# EAGLE board Logger_2019 (EAGLE 7.3.0)
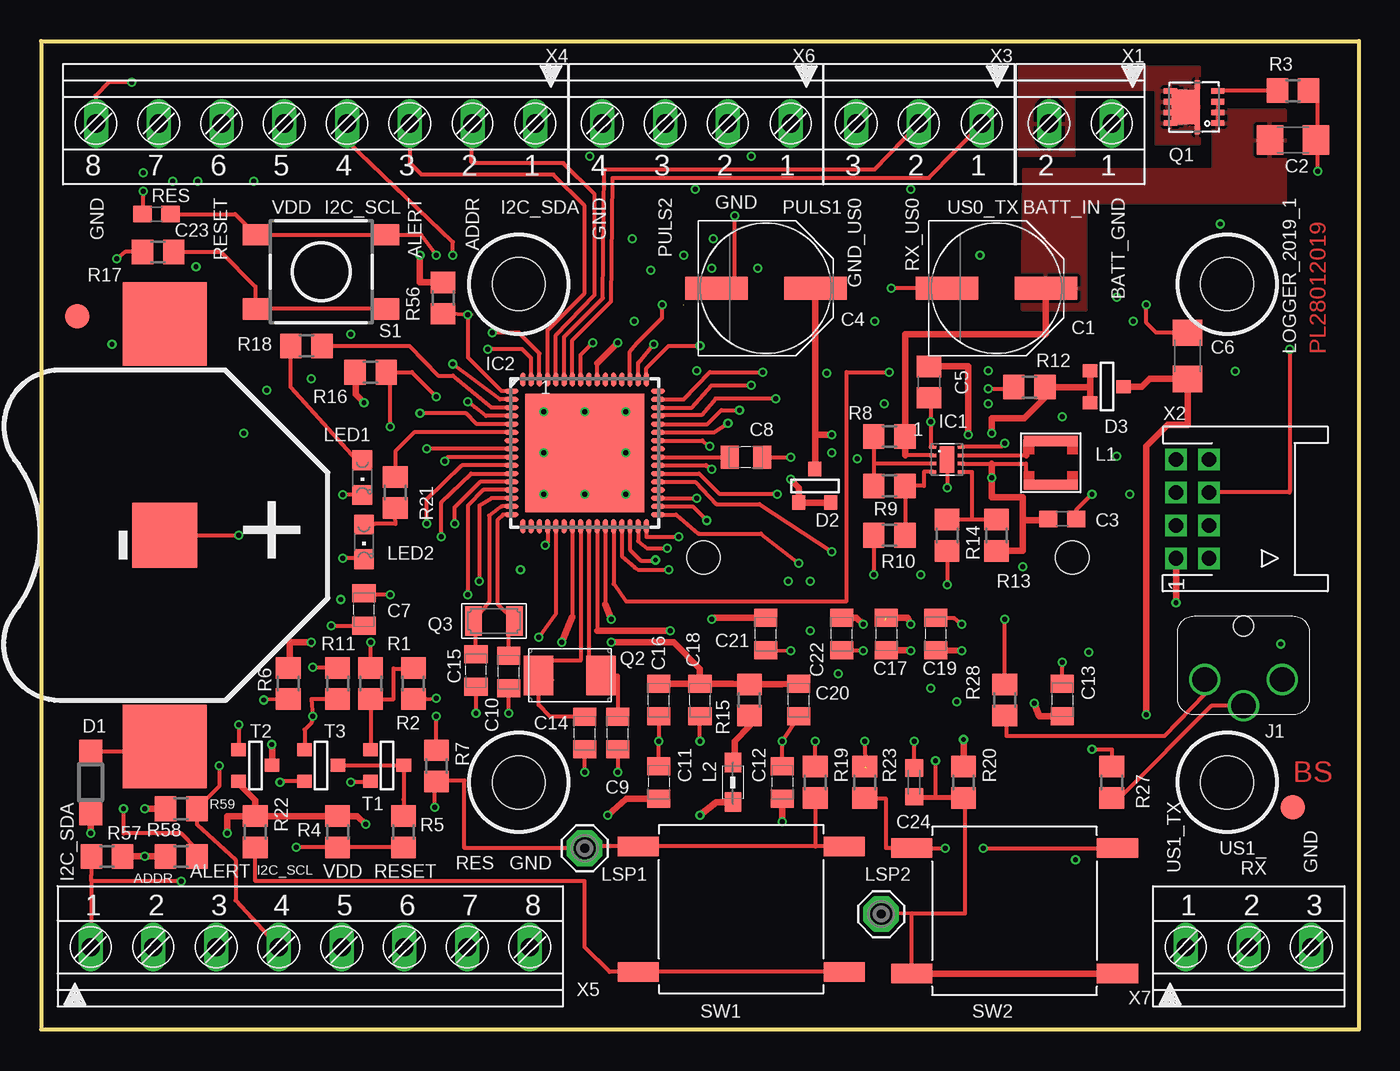
[diagram p0: board, top side]
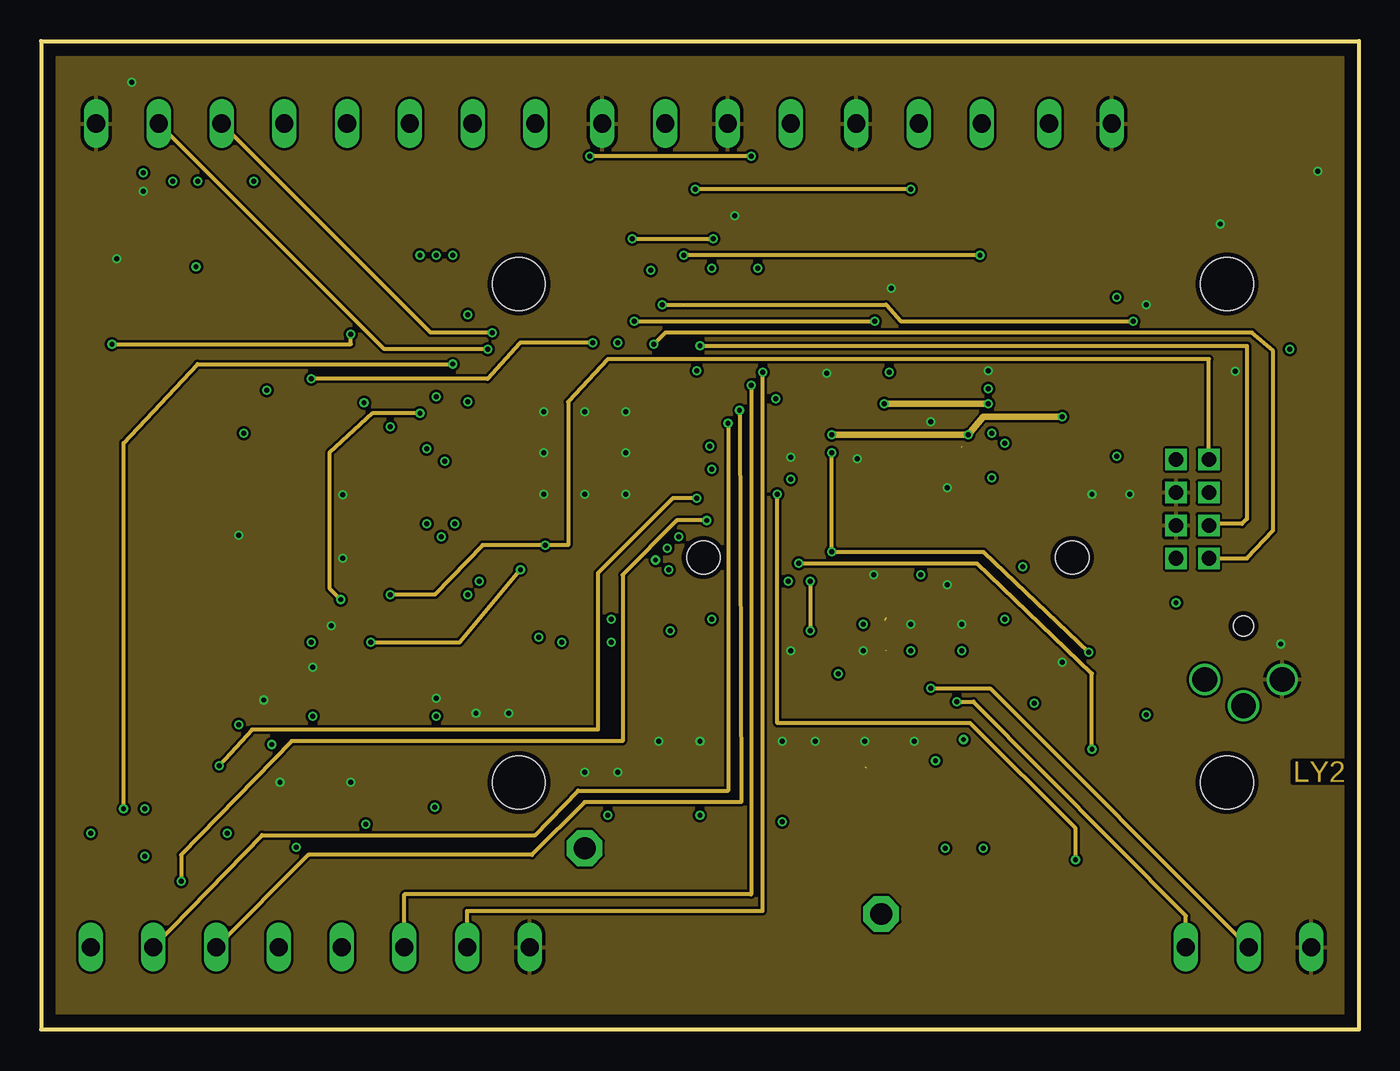
[diagram p1: board, inner layer Route2]
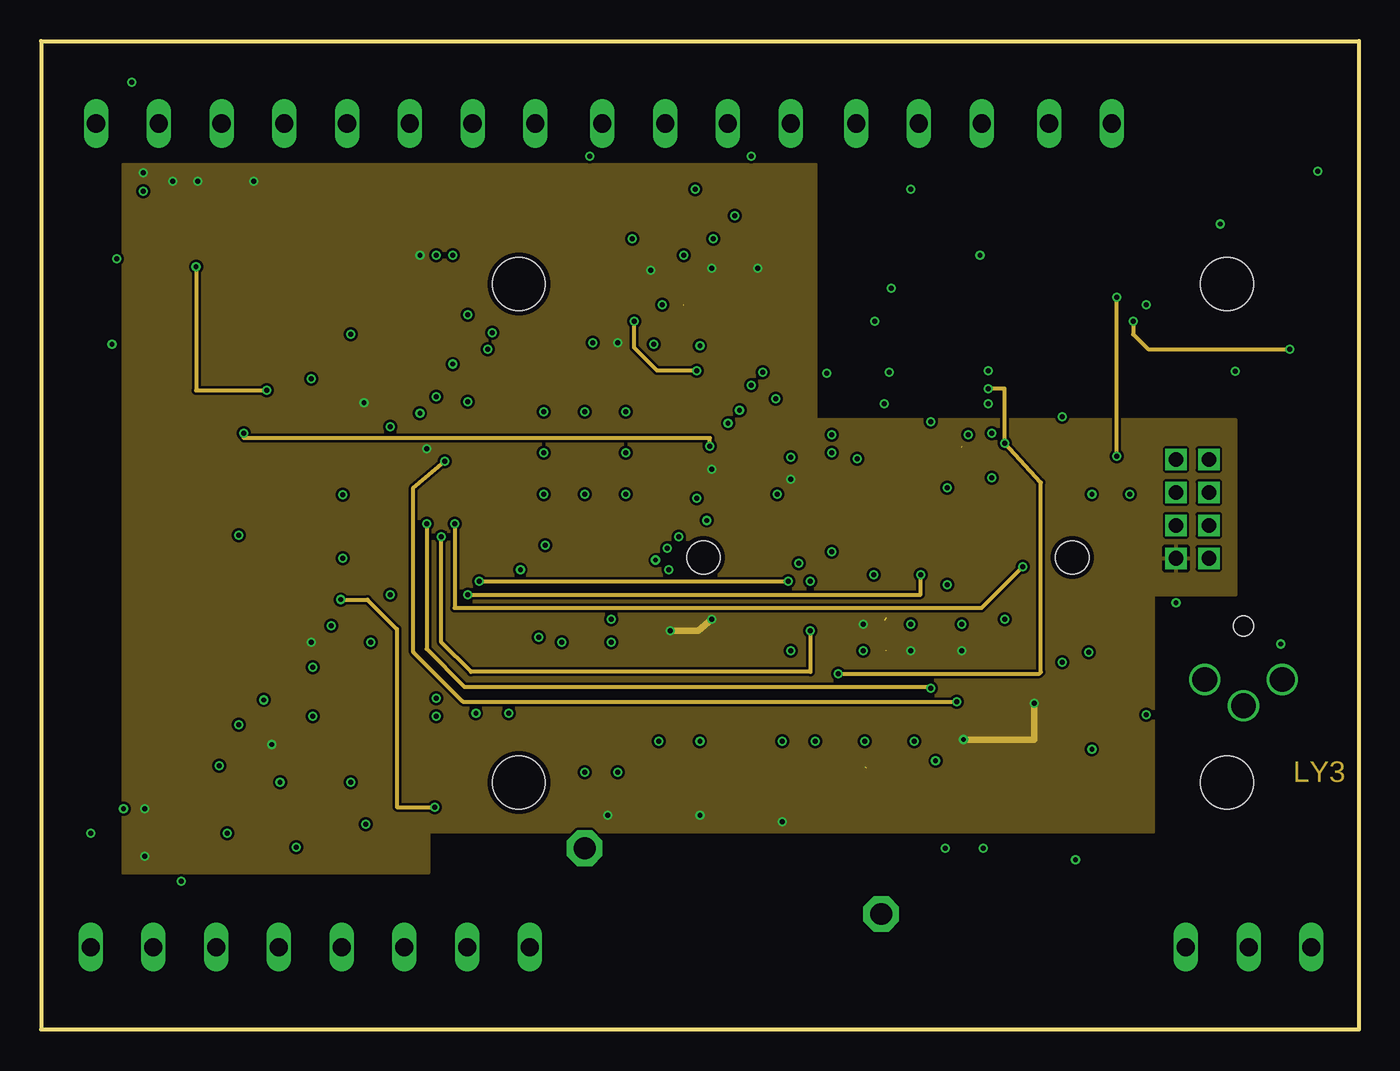
[diagram p2: board, inner layer Route3]
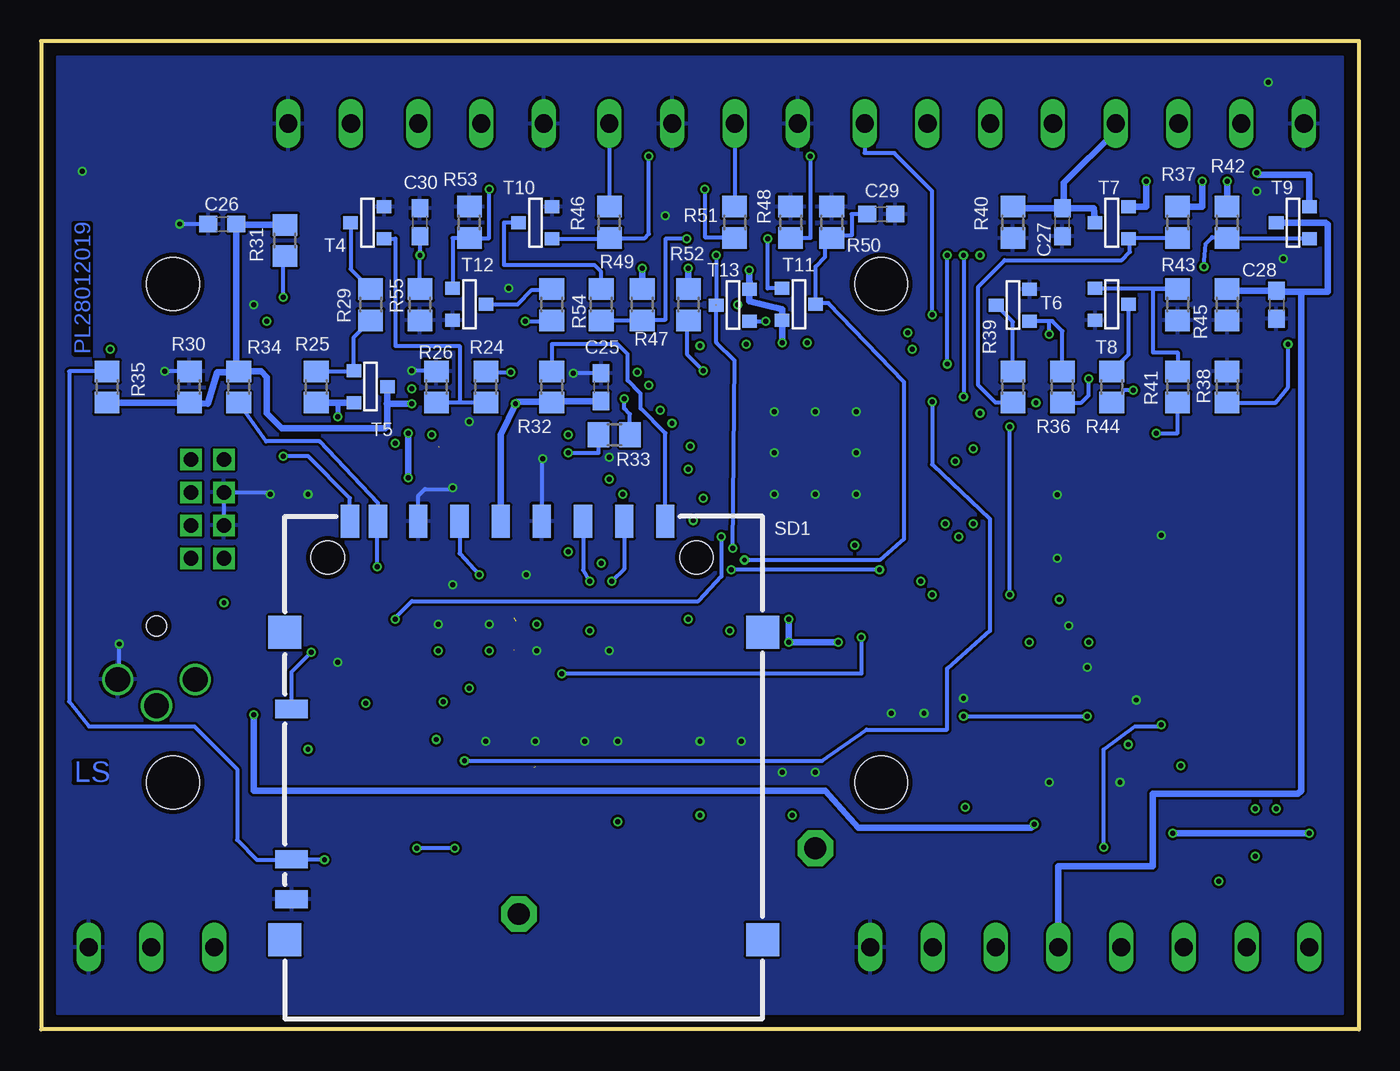
[diagram p3: board, bottom side, seen from below]

Size 80 x 60 mm. Coordinates in mm from the lower left corner, seen from the top.
Outline: 0,0 80,0 80,60 0,60 0,0
Copper layers (1+2*3+16): Top 0.035mm / dielectric 0.2mm / Route2 0.035mm / dielectric 1mm / Route3 0.035mm / dielectric 0.2mm / Bottom 0.035mm
Design rules "PCB-POOL HighSpec *": minimum track width 0.125mm, minimum drill 0.2mm, track to track 0.15mm, track to pad 0.15mm, pad to pad 0.15mm, via to via 0.15mm, smd to smd 0mil, copper to edge 0.3mm, drill to drill 0.2mm, minimum pad ring 0.2mm, minimum via ring 0.125mm, stop-mask expansion 0.075mm, vias tented up to drill 0mil, thermal gap 0.2mm
Net classes: 1 GND: width 0.2 mm; 2 VCC: width 0.25 mm
Holes 3.2 mm at 29,15 72,15 72,45.25 29,45.25

## Footprints (pad centres in the part's own frame; a part is rotated, then mirrored left to right if it is on the bottom)
3082 = smd 5.08 x 5.08: + -12.827,0; +1 12.827,0 | smd 3.962 x 3.962: - 0,0
PANASONIC_E = smd 3.8 x 1.4: + 3,0; - -3,0
C1206 = smd 1.6 x 1.8: 1 -1.4,0; 2 1.4,0
C0603 = smd 1.1 x 1: 1 -0.85,0; 2 0.85,0
C0805 = smd 1.3 x 1.5: 1 -0.95,0; 2 0.95,0
0805 = smd 1.092 x 1.397: 1 -0.991,0; 2 0.991,0
C0603K = smd 1.05 x 1.08: 1 -0.875,0; 2 0.875,0
SOD123 = smd 1.4 x 1.4: A 1.9,0; C -1.9,0
SOT-23$1 = smd 0.787 x 0.889: 1 0.025,-1.016; 2 -0.94,1.016; 3 0.991,1.016
DSG_PWSO-N8_EXP = smd 0.2 x 0.4: 1 -0.75,-0.85; 2 -0.25,-0.85; 3 0.25,-0.85; 4 0.75,-0.85; 5 0.75,0.85; 6 0.25,0.85; 7 -0.25,0.85; 8 -0.75,0.85 | smd 1.6 x 0.9: EXP 0,0
QFN64 = smd 0.85 x 0.3: 1 -4.45,3.75; 2 -4.45,3.25; 3 -4.45,2.75; 4 -4.45,2.25; 5 -4.45,1.75; 6 -4.45,1.25; 7 -4.45,0.75; 8 -4.45,0.25; 9 -4.45,-0.25; 10 -4.45,-0.75; 11 -4.45,-1.25; 12 -4.45,-1.75; 13 -4.45,-2.25; 14 -4.45,-2.75; 15 -4.45,-3.25; 16 -4.45,-3.75; 33 4.45,-3.75; 34 4.45,-3.25; 35 4.45,-2.75; 36 4.45,-2.25; 37 4.45,-1.75; 38 4.45,-1.25; 39 4.45,-0.75; 40 4.45,-0.25; 41 4.45,0.25; 42 4.45,0.75; 43 4.45,1.25; 44 4.45,1.75; 45 4.45,2.25; 46 4.45,2.75; 47 4.45,3.25; 48 4.45,3.75 | smd 0.3 x 0.85: 17 -3.75,-4.45; 18 -3.25,-4.45; 19 -2.75,-4.45; 20 -2.25,-4.45; 21 -1.75,-4.45; 22 -1.25,-4.45; 23 -0.75,-4.45; 24 -0.25,-4.45; 25 0.25,-4.45; 26 0.75,-4.45; 27 1.25,-4.45; 28 1.75,-4.45; 29 2.25,-4.45; 30 2.75,-4.45; 31 3.25,-4.45; 32 3.75,-4.45; 49 3.75,4.45; 50 3.25,4.45; 51 2.75,4.45; 52 2.25,4.45; 53 1.75,4.45; 54 1.25,4.45; 55 0.75,4.45; 56 0.25,4.45; 57 -0.25,4.45; 58 -0.75,4.45; 59 -1.25,4.45; 60 -1.75,4.45; 61 -2.25,4.45; 62 -2.75,4.45; 63 -3.25,4.45; 64 -3.75,4.45 | smd 7.2 x 7.2: 65 0,0
LUMBERG1502_01 = drill 1.5: P$1 -2.35,0.75; P$2 0,2.35; P$3 2.35,0.75 | hole 1.2: 0,-2.5
LPS3008 = smd 0.63 x 3.3: 1 -1.335,0; 2 1.335,0
0805' = smd 1.2 x 1: 1 -1.2,0; 2 1.2,0
CHIPLED_0805 = smd 1.2 x 1.2: A 0,-1.05; C 0,1.05
SE13 = drill 1.321 pad 2.159 octagon: MP 0,0
ROUND2_1.5MM = smd 1.5 x 1.5: FID 0,0
TRANSISTOR-FET_1212-8S = smd 0.8 x 0.34: 1 -1.435,0.97; 2 -1.435,0.325; 3 -1.435,-0.325; 4 -1.435,-0.975; 5 1.435,-0.975; 6 1.435,-0.325; 7 1.435,0.325; 8 1.435,0.975 | smd 0.3 x 0.8: 9 -0.2,-1.225; 10 -0.2,1.25 | smd 1.7 x 2.1: 11 0.5,-0.015
CRYSTAL2P5.0X3.2 = smd 1.8 x 2.4: 1 -1.9,0; 2 1.9,0
CRYSTAL2P3.2X1.5 = smd 1 x 1.8: 1 -1.25,0; 2 1.25,0
R0805 = smd 1.3 x 1.5: 1 -0.95,0; 2 0.95,0
DTSM-6 = smd 1.55 x 1.3: 1 -3.975,2.25; 2 3.975,2.25; 3 -3.975,-2.25; 4 3.975,-2.25
DM1AA-SF-PEJ = smd 1.1 x 2: 1 6.1,14.95; 2 3.6,14.95; 3 1.1,14.95; 4 -1.4,14.95; 5 -3.9,14.95; 6 -6.4,14.95; 7 -8.85,14.95; 8 -10.55,14.95; 9 8.6,14.95 | smd 2 x 1.1: CDS -14.1,3.55; COM -14.1,-8; WPS -14.1,-5.566 | smd 2 x 2: G1 -14.5,8.2; G2 -14.5,-10.45; G3 14.5,-10.45; G4 14.5,8.2 | hole 2: -11.9,12.75; 10.5,12.75
MULTIMEC_5GSH935 = smd 2.5 x 1.2: P -6.25,-3.81; P1 6.249,-3.81; S -6.25,3.81; S1 6.25,3.81
SOT-23 = smd 0.787 x 0.889: 1 0.025,-1.016; 2 -0.94,1.016; 3 0.991,1.016
ZETEX_SOT-23 = smd 0.787 x 0.889: 1 0.025,-1.016; 2 -0.94,1.016; 3 0.991,1.016
2POL381 = drill 1.1 long: 1 0,0; 2 3.81,0
DP11_8DP-2DS = drill 0.9 square: 1 3,-9.2; 2 3,-7.2; 3 1,-9.2; 4 1,-7.2; 5 -1,-9.2; 6 -1,-7.2; 7 -3,-9.2; 8 -3,-7.2
3POL381 = drill 1.1 long: 1 0,0; 2 3.81,0; 3 7.62,0
8POL381 = drill 1.1 long: 1 0,0; 2 3.81,0; 3 7.62,0; 4 11.43,0; 5 15.24,0; 6 19.05,0; 7 22.86,0; 8 26.67,0
4POL381 = drill 1.1 long: 1 0,0; 2 3.81,0; 3 7.62,0; 4 11.43,0

## Placement (x,y rotation side)
BH1  KEYSTONE_CELL_CLIP 3082  [3082]  7.5,30 90 top
C1  100µF/25V  [PANASONIC_E]  58,45 0 top
C2  10µF/25V  [C1206]  76,54 0 top
C3  22µF/10V  [C0603]  62,31 0 top
C4  100µF/25V  [PANASONIC_E]  44,45 0 top
C5  100nF/16V  [C0805]  53.9,39.3 270 top
C6  10µ/25V  [C1206]  69.6,40.9 270 top
C7  100n  [0805]  19.6,25.5 90 top
C8  1u  [0805]  42.8,34.75 180 top
C9  12p  [0805]  35,18 90 top
C10  18p  [0805]  28.4,21.7 90 top
C11  100n  [0805]  37.5,15 270 top
C12  100n  [0805]  45,15 270 top
C13  100n  [0805]  62,20 270 top
C14  12p  [0805]  33,18 90 top
C15  18p  [0805]  26.4,21.8 90 top
C16  10µ  [0805]  37.5,20 90 top
C17  100n  [0805]  51.3,24 270 top
C18  100n  [0805]  40,20 90 top
C19  100n  [0805]  54.3,24 270 top
C20  100n  [0805]  46,20 90 top
C21  100n  [0805]  44,24 90 top
C22  10µ  [0805]  48.6,24 90 top
C23  10n  [C0603]  7,49.5 0 top
C24  10n  [C0603K]  53,15 270 top
C25  100nF  [C0603]  46,39 90 bottom
C26  100nF  [C0603]  69,48.9 180 bottom
C27  100nF  [C0603]  18,49 270 bottom
C28  100nF  [C0603]  5,44 270 bottom
C29  100nF  [C0603]  29,49.5 0 bottom
C30  100nF  [C0603]  57,49 90 bottom
D1  RSX101M-30  [SOD123]  3,15 90 top
D2  BAT54C  [SOT-23$1]  47,33 180 top
D3  BAT54C  [SOT-23$1]  64.7,39 90 top
IC1  TPS62125  [DSG_PWSO-N8_EXP]  55,34.6 270 top
IC2  EFM32G230F128  [QFN64]  33,35 0 top
J1  LUMBERG1502_01  [LUMBERG1502_01]  73,22 180 top
L1  LPS3008/22µH  [LPS3008]  61.3,34.4 270 top
L2  BLM21B102S  [0805']  42,15 90 top
LED1  SML-H12U8TT86  [CHIPLED_0805]  19.5,33.5 180 top
LED2  SML-H12Y8TT86  [CHIPLED_0805]  19.6,29.6 180 top
LSP1  (n.b.)SE13  [SE13]  33,11 0 top
LSP2  (n.b.)SE13  [SE13]  51,7 0 top
PASS1  ROUND_1MM1.5  [ROUND2_1.5MM]  2.2,43.3 0 top
PASS2  ROUND_1MM1.5  [ROUND2_1.5MM]  76,13.5 0 top
Q1  SI7121DN  [TRANSISTOR-FET_1212-8S]  70,56 180 top
Q2  NX5032GA/32MHz/8pF  [CRYSTAL2P5.0X3.2]  32.1,21.5 180 top
Q3  CM7V, 32768Hz/12.5pF  [CRYSTAL2P3.2X1.5]  27.5,24.8 180 top
R1  100  [R0805]  20,21 270 top
R2  100K  [R0805]  22.6,21 90 top
R3  100k  [R0805]  76,57 180 top
R4  100K  [R0805]  18,12 90 top
R5  100  [R0805]  22,12 270 top
R6  100K  [R0805]  15,21 90 top
R7  100  [R0805]  24,16 90 top
R8  1M47  [R0805]  51.5,36 0 top
R9  200K  [R0805]  51.5,33 180 top
R10  30K9  [R0805]  51.5,30 0 top
R11  100K  [R0805]  18,21 270 top
R12  100K  [R0805]  60,39 180 top
R13  2M  [R0805]  58,30 270 top
R14  560K  [R0805]  55,30 90 top
R15  1  [R0805]  43,20 90 top
R16  100K  [R0805]  20,39.9 180 top
R17  100  [R0805]  7.1,47.2 180 top
R18  1K2  [R0805]  16.1,41.5 180 top
R19  (n.b.)100K/*10nF*/  [R0805]  47,15 270 top
R20  100K  [R0805]  56,15 90 top
R21  1K2  [R0805]  21.5,32.6 270 top
R22  100  [R0805]  13,12 90 top
R23  100  [R0805]  50,15 90 top
R24  100  [R0805]  53,39 90 bottom
R25  100K  [R0805]  63.3,39 270 bottom
R26  100K  [R0805]  56,39 270 bottom
R27  10K  [R0805]  65,15 270 top
R28  10K  [R0805]  58.5,20 270 top
R29  100  [R0805]  60,44 270 bottom
R30  100K  [R0805]  71,39 270 bottom
R31  10K  [R0805]  65.2,47.9 90 bottom
R32  10K  [R0805]  49,39 270 bottom
R33  1K  [R0805]  45.2,36.1 0 bottom
R34  1K  [R0805]  68,39 90 bottom
R35  (n.b.)10K  [R0805]  76,39 270 bottom
R36  100  [R0805]  18,39 270 bottom
R37  100K  [R0805]  11,49 90 bottom
R38  100K  [R0805]  8,39 270 bottom
R39  100  [R0805]  21,39 270 bottom
R40  100K  [R0805]  21,49 90 bottom
R41  100  [R0805]  11,39 270 bottom
R42  100K  [R0805]  8,49 90 bottom
R43  100K  [R0805]  11,44 90 bottom
R44  100  [R0805]  15,39 270 bottom
R45  100K  [R0805]  8,44 90 bottom
R46  100  [R0805]  45.5,49 90 bottom
R47  100K  [R0805]  43.5,44 90 bottom
R48  100K  [R0805]  34.5,49 270 bottom
R49  100  [R0805]  46,44 270 bottom
R50  100K  [R0805]  32,49 270 bottom
R51  100  [R0805]  37.9,49 90 bottom
R52  100K  [R0805]  40.7,44 90 bottom
R53  100K  [R0805]  54,49 270 bottom
R54  100  [R0805]  49,44 270 bottom
R55  100K  [R0805]  57,44 90 bottom
R56  1K  [R0805]  24.4,44.4 270 top
R57  1K  [R0805]  4,10.5 0 top
R58  1K  [R0805]  8.5,10.5 180 top
R59  1K  [R0805]  8.5,13.4 180 top
S1  SWPB_B3S1000  [DTSM-6]  17,46 0 top
SD1  DM1AA-SF-PEJ  [DM1AA-SF-PEJ]  50.7,15.9 0 bottom
SW1  5GSH935  [MULTIMEC_5GSH935]  42.5,7.3 180 top
SW2  5GSH935  [MULTIMEC_5GSH935]  59.1,7.2 0 top
T1  2N7002  [SOT-23]  21,16 90 top
T2  FDN358P  [ZETEX_SOT-23]  13,16 90 top
T3  2N7002  [SOT-23]  17,16 90 top
T4  2N7002  [ZETEX_SOT-23]  60.2,49 270 bottom
T5  FDN358P  [ZETEX_SOT-23]  60,39 90 bottom
T6  2N7002  [ZETEX_SOT-23]  21,44 270 bottom
T7  FDN358P  [ZETEX_SOT-23]  15,49 270 bottom
T8  2N7002  [ZETEX_SOT-23]  15,44 90 bottom
T9  FDN358P  [ZETEX_SOT-23]  4,49 270 bottom
T10  2N7002  [ZETEX_SOT-23]  50,49 270 bottom
T11  FDN358P  [ZETEX_SOT-23]  34,44 90 bottom
T12  2N7002  [ZETEX_SOT-23]  54,44 90 bottom
T13  FDN358P  [ZETEX_SOT-23]  38,44 270 bottom
X1  MKDS1/2-3,81  [2POL381]  65,55 180 top
X2  DF11_8DP_2DS  [DP11_8DP-2DS]  78.1,31.6 270 top
X3  MKDS1/3-3,81  [3POL381]  57.1,55 180 top
X4  MKDS1/8-3,81  [8POL381]  30,55 180 top
X5  MKDS1/8-3,81  [8POL381]  3,5 0 top
X6  MKDS1/4-3,81  [4POL381]  45.5,55 180 top
X7  MKDS1/3-3,81  [3POL381]  69.5,5 0 top

## Library data of the parts
BH1 = battery
C1 C4 C23 C25-C30 R3 R16-R26 R29-R59 = resistor
C2 C3 C5 C6 C24 R1 R2 R4-R15 R27 R28 = rcl
C7-C22 = IAR.RLC
D1 = diode
D2 D3 = zetex
IC1 = texas_Kiermaier
IC2 = EnergyMicro
J1 Q2 Q3 = EdM 2011
L1 = inductors
L2 = WE-CBF; MPN: 7427920; OC_FARNELL: 1635707; OC_NEWARK: 08P2358; PACKAGE: IND-0805; SUPPLIER: Wuerth Elektronik
LED1 LED2 = led
LSP1 LSP2 = solpad
PASS1 PASS2 = Passermarks
Q1 = dcdc_BB3_V0
S1 = switch-tact
SD1 = con-hirose
SW1 SW2 = switch-omron_1
T1 T3 = zetex; OC_FARNELL: unknown; OC_NEWARK: unknown
T2 T4-T13 = SESA
X1 X3-X7 = con-phoenix-381
X2 = con-hirose_1

## Nets
1: C3.1 D3.2 D3.3 IC1.6 L1.2 R12.1 R13.2
_: Q1.5 Q1.6 Q1.7 Q1.8 Q1.9 Q1.10 Q1.11 X1.2
AVDD [VCC]: C16.2 C18.2 C20.2 IC2.23 IC2.27 R15.2
BATT_INPUT: C1.+ C2.1 IC1.2 Q1.1 Q1.2 Q1.3 R8.2
GND: BH1.- C1.- C2.2 C3.2 C4.- C5.2 C6.1 C7.1 C8.1 C9.1 C10.1 C11.1 C12.1 C13.1 C14.1 C15.1 C16.1 C17.1 C18.1 C19.1 C20.1 C21.1 C22.1 C23.1 C24.1 C25.2 C26.2 C27.2 C28.2 C29.2 C30.2 IC1.1 IC1.EXP IC2.65 J1.P$1 LED1.C LED2.C R2.1 R3.1 R6.1 R10.1 R11.1 R14.1 R17.2 R19.1 R23.2 R26.1 R30.1 R38.1 R40.1 R43.1 R45.1 R48.1 R50.1 R53.1 R55.1 SD1.3 SD1.6 SD1.COM T1.2 T3.2 T4.2 T6.2 T8.2 T10.2 T12.2 X1.1 X2.3 X2.5 X3.3 X4.8 X5.8 X6.2 X6.4 X7.3
MCU_RESET: C7.2 C23.2 IC2.20 R16.1 S1.1 S1.2 X2.8
N$2: R1.2 R2.2 T1.3
N$3: R37.1 R39.2 T7.3
N$4: R25.1 R29.2 T5.3
N$5: IC1.3 R8.1 R9.2
N$6: R29.1 T4.1
N$7: R24.1 R26.2 T4.3
N$8: IC1.4 R9.1 R10.2
N$9: IC1.7 L1.1
N$10: R39.1 T6.1
N$11: R36.1 R38.2 T6.3
N$12: R42.1 R44.2 T9.3
N$13: R44.1 T8.1
N$14: L2.2 R15.1
N$15: LED1.A R18.2
N$16: LED2.A R21.2
N$17: BH1.+ D1.A
N$18: R41.1 R43.2 T8.3
N$19: R32.1 SD1.9
N$20: Q1.4 R3.2
N$21: R4.1 R5.2 T2.3
N$22: R7.2 R11.2 T3.3
N$23: R31.1 SD1.8
N$24: R47.1 R49.2 T11.3
N$25: R5.1 T1.1 T3.1
N$26: R17.1 S1.3 S1.4
N$27: R23.1 SW2.S SW2.S1
N$28: R49.1 T10.1
N$29: R22.1 SW1.S SW1.S1
N$30: C8.2 IC2.40
N$31: R46.1 R48.2 T10.3
N$32: R52.1 R54.2 T13.3
N$33: R54.1 T12.1
N$34: R51.1 R53.2 T12.3
N$46: IC1.5 R13.1 R14.2
PA0_SENSOR_I2C_SDA: IC2.1 R56.2 X4.1
PA1_SENSOR_I2C_SCL: IC2.2 R58.1 X4.4
PA2_POWER_LED: IC2.3 R18.1
PA3_KEY_START_STOP: C24.2 IC2.4 LSP2.MP R20.1 SW2.P SW2.P1
PA4_SIGNAL_POWER: IC2.5 LSP1.MP R7.1 R19.2 SW1.P SW1.P1
PA5_LOG_FLUSH_LED: IC2.6 R21.1
PB7_LFXTAL_P: C15.2 IC2.15 Q3.2
PB8_LFXTAL_N: C10.2 IC2.16 Q3.1
PB11_POWER_GOOD: IC1.8 IC2.21 R12.2
PB13_HFXTAL_P: C14.2 IC2.24 Q2.2
PB14_HFXTAL_N: C9.2 IC2.25 Q2.1
PC0_US1_TX: IC2.9 X7.1
PC1_US1_RX: IC2.10 X7.2
PC2_SD_SDO: IC2.11 SD1.2
PC3_SD_SDI: IC2.12 R34.1 SD1.7
PC4_SD_CLK: IC2.13 SD1.5
PC5_SD_CS: IC2.14 SD1.1
PC6_SD_CD: IC2.37 R33.1 SD1.CDS
PC7_SD_WP: IC2.38 R35.1 SD1.WPS
PC9_SENSOR2_MOSFET: IC2.42 R41.2
PC10_SENSOR2_ADDR: IC2.43 X5.2
PC11_SENSOR2_ALERT: IC2.44 X5.3
PC12_SD_PULLUP: IC2.45 R33.2
PC13_SENSOR2_RESET: IC2.46 X5.6
PC14_SENSOR2_RESERVE: IC2.47 X5.7
PD0_SD_POWER: IC2.28 R24.2
PD1_HOLD_POWER: IC2.29 R1.1
PD2_PULS1_COUNTER: C29.1 IC2.30 R50.2 T11.1
PD3_PULS2_COUNTER: C30.1 IC2.31 R55.2 T13.1
PD4_LEUART_TX: IC2.32 R28.1
PD5_LEUART_RX: IC2.33 R27.1
PD6_SENSOR_I2C_SDA: IC2.34 R57.1 X5.1
PD7_SENSOR_I2C_SCL: IC2.35 R59.1 X5.4
PE9_SENSOR1_MOSFET: IC2.57 R36.2
PE10_US0_TX: IC2.58 X3.1
PE11_US0_RX: IC2.59 X3.2
PE12_SENSOR1_ADDR: IC2.60 X4.2
PE13_SENSOR1_ALERT: IC2.61 X4.3
PE14_SENSOR1_RESET: IC2.62 X4.6
PE15_SENSOR1_RESERVE: IC2.63 X4.7
PF0_DBG_SWCLK: IC2.49 X2.4
PF1_DBG_SWDIO: IC2.50 X2.2
PF2_DBG_SWO: IC2.51 X2.6
PULS1_COUNTER: R46.2 X6.1
PULS2_COUNTER: R51.2 X6.3
RXD_HOST: J1.P$3 R28.2
SD_3V: C25.1 C26.1 R30.2 R31.2 R32.2 R34.2 R35.2 SD1.4 T5.1
TXD_HOST: J1.P$2 R27.2
VBATT: C6.2 D1.C D3.1 R4.2 R22.2 T2.2
VDD_SENSOR1: C27.1 R40.2 T7.1 X4.5
VDD_SENSOR2: C28.1 R45.2 T9.1 X5.5
VMCU: C11.2 C12.2 C13.2 C17.2 C19.2 C21.2 C22.2 D2.2 D2.3 IC2.8 IC2.26 IC2.39 IC2.55 L2.1 R6.2 R16.2 R20.2 R37.2 R42.2 R47.2 R52.2 R56.1 R57.2 R58.2 R59.2 T2.1 T7.2 T9.2 T11.2 T13.2 X2.1
VSD_CARD: C4.+ C5.1 D2.1 R25.2 T5.2

## Tracks (layer width: path | path; a pad name or v marks a point on that pad's centre or on a via)
1  (via drill 0.3)
  Top 0.254: IC1.6 57.7,34.35 59.8,34.35 59.8,33.06 L1.2 | 61.15,30.9 C3.1 | R12.1 61,39 61,38.9 | 61,38.4 61,38.9 | 61,38.9 61.1,39 | 63.58,39 63.68,39.1
  Top 0.406: 57.7,34.35 v57.7,33.5 57.7,32.3 59.6,32.3 59.6,30.9 | 59.6,30.9 61.15,30.9 | R13.2 59.6,29.05 59.6,30.9 | 61,38.4 59.7,37.1 57.7,37.1 v57.7,36.2 | D3.2 63.68,39.1 D3.3 | 61.1,39 63.58,39
  Bottom 0.406: v57.7,33.5 v57.7,36.2
_
  pour Top: 70.3,53.8 70.3,58.4 59.4,58.4 59.4,53.1 62.7,53.1 62.7,57.1 67.7,57.1 67.7,53.8
AVDD  (via drill 0.3)
  Top 0.254: IC2.23 32.25,25.05 | IC2.27 34.25,25.8
  Top 0.406: C16.2 C18.2 | C18.2 41.96,20.99 R15.2 44.96,20.95 C20.2 | 32.25,25.05 v31.6,23.5 | v34.6,23.5 38.4,23.5 40,21.9 C18.2 | 34.25,25.8 v34.6,24.9
  Bottom 0.406: v34.6,24.9 v34.6,23.5 v31.6,23.5
BATT_INPUT
  Top 0.254: Q1.3 Q1.1 | IC1.2 52.45,34.85
  Top 0.406: 52.45,34.85 R8.2 52.45,42.2 61,42.2 C1.+
  pour Top: 59.6,43.7 59.7,52.2 71.2,52.2 71.2,55.8 75.5,55.8 75.5,50.2 63.4,50.2 63.4,43.7
GND  (via drill 0.3)  (2 unrouted)
  Top 0.254: 77.5,56.75 R3.1 77.5,56.45 77.5,54.2 | IC1.1 54,35.35 v54,36.9 54,38 54.1,38.15 C5.2 | C1.- v51.6,45 | R10.1 v50.55,27.6 | R14.1 v55,27 | C13.1 62.2,20.89 62,20.9 v62,22.3 | 77.5,54.2 77.5,53.9 | 77.5,53.9 77.4,53.8 | v77.5,52.1 77.5,53.9 | 77.5,54.2 C2.2 | C15.1 v26.4,19.2 | C16.1 37.49,18.6 v37.49,17.51 v37.5,17.5 C11.1 | v40,17.5 C18.1 | C20.1 v45,17.5 C12.1 | C21.1 v45.5,23 | BH1.- v12,30 | LED2.C 19.6,28.6 v18.3,28.6 | LED1.C v18.3,32.45 | R6.1 v13.5,20 | 17.95,21.9 R11.1 17.95,22 v16.5,22 | T1.2 20,15 v18.8,15 18.7,15 | T3.2 14.5,15.06 v14.5,15 | 22.2,20.05 R2.1 23.35,20.05 v24,20.1 | v28.4,19.2 C10.1 | C24.1 v53,17.5 | 50.1,15.88 v50,17.5 | R19.1 v47,17.5 | C8.1 v45.5,34.75 | C23.1 6.2,49.5 v6.2,50.9 | R17.2 5.1,47.2 v4.6,46.8 | 19.01,24.51 C7.1 v17.6,24.5 | IC1.EXP v55,32.9 | C4.- 42.1,45 v42.1,49.4 | IC2.65 v33,32.5 | C22.1 49.69,23.01 v49.9,23 | 51,25 51.2,24.8 | C19.1 55.41,24.99 v55.9,24.6 | C3.2 62.85,31.55 v63.8,32.5 | C9.1 v35,15.6 | 3.33,55.23 X4.8 3.3,55.03 3.3,56.7 4.1,57.5 v5.5,57.5 | 68.8,42.3 67.7,42.3 67.1,42.9 v67.1,44 | v33,15.6 C14.1
  Top 0.406: C17.1 52.61,24.99 v52.8,24.6 | C6.1 68.8,42.3
  Bottom 0.254: 55.02,43.1 T12.2 | C26.2 v71.6,48.9 | J1.P$1 75.25,21.45 v75.25,23.4 | R26.1 56,40.3 56.1,40 v57.5,40 | C25.2 v47.7,39.85 | v66.1,32.5 66.2,32.6 X2.5 X2.3 | R30.1 v72.5,39.95 | SD1.6 57.1,32.4 56.7,32.8 55.1,32.8 v55,32.9 | 49.6,34.7 SD1.3
  other vias: 30.5,37.5 33,37.5 35.5,37.5 35.5,35 30.5,35 30.5,32.5 35.5,32.5 49.55,34.65
  pour Route2: 1,59 79,59 79,1 1,1
  pour Bottom: 1,59 79,59 79,1 1,1
MCU_RESET  (via drill 0.3)
  Top 0.254: IC2.20 30.75,29.55 v30.6,29.4 | C23.2 11.78,49.5 S1.1 S1.2 23.05,48.25 v24,47 | v21.2,36.6 21.2,39.95 R16.1 22.5,39.9 v24,38.4 | v21.2,26.4 19.79,26.4 C7.2
  Route2 0.254: X2.8 70.9,40.7 34.4,40.7 32,38.1 32,29.4 v30.6,29.4 26.8,29.4 23.9,26.4 v21.2,26.4
  Bottom 0.254: v24,47 v24,38.4 | v21.2,26.4 v21.2,36.6
N$2
  Top 0.254: R1.2 21.4,20.05 21.4,21.9 22.7,21.9 R2.2 | R1.2 20,20.2 | R1.2 20,17.01 T1.3
N$3
  Bottom 0.254: R37.1 13.94,48.05 T7.3 13.9,47.92 13.9,47.2 14.4,46.7 21.5,46.7 23.1,45.1 23.1,39.1 22.05,38.05 R39.2
N$4
  Bottom 0.254: R25.1 61.06,39.95 T5.3 61.02,42.03 R29.2
N$5
  Top 0.254: IC1.3 50.55,34.35 | 50.55,34.35 R9.2 | R8.1 50.55,34.35
N$6
  Bottom 0.254: T4.1 61.22,46.17 R29.1
N$7
  Bottom 0.254: R24.1 54.6,38.05 | 54.6,38.05 R26.2 | T4.3 58.5,48.01 58.5,41.5 54.6,41.5 54.6,38.05
N$8
  Top 0.254: IC1.4 53.6,33.85 53.6,33 R9.1 R10.2
N$9
  Top 0.254: IC1.7 59.8,34.85 | L1.1 59.8,35.73
  Top 0.406: 59.8,35.73 59.8,34.85
N$10
  Bottom 0.254: R39.1 21,42.96 T6.1
N$11  (via drill 0.3)
  Route2 0.254: v4.3,41.6 18.8,41.6 v18.8,42.2
  Bottom 0.254: R36.1 18,42.4 18.6,43 18.8,43 | 18.8,43 T6.3 | R38.2 5.05,38.05 4.3,39 v4.3,41.6 | v18.8,42.2 18.8,43
N$12  (via drill 0.3)
  Route3 0.254: v9.4,46.3 9.4,38.8 v13.7,38.8
  Bottom 0.254: T9.3 8,48.01 R42.1 | R42.1 8,48 | v13.7,38.8 14.25,38.8 R44.2 | v9.4,46.3 9.3,47.7 8.9,48.1 8.05,48.1 R42.1
N$13
  Bottom 0.254: T8.1 13.98,40.97 R44.1
N$14
  Top 0.406: R15.1 43,18.4 42.1,17.5 42.1,16.3 L2.2
N$15
  Top 0.254: LED1.A 19.15,34.55 15.15,39 R18.2
N$16
  Top 0.254: R21.2 21.45,31.45 21.5,30.7 20.25,30.7 LED2.A
N$17
  Top 0.254: 7.5,17.2 BH1.+ 7.5,16.9 D1.A
N$18
  Bottom 0.254: T8.3 11,44.99 R43.2 12.5,44.95 12.5,41.1 11,41.1 R41.1
N$19
  Bottom 0.254: SD1.9 42.1,36.2 43.6,37.7 43.6,38.6 44.4,39.4 44.4,41 45,41.6 49,41.6 R32.1
N$20
  Top 0.254: R3.2 71.46,57 Q1.4
N$21  (via drill 0.3)
  Top 0.254: R5.2 R4.1 v15.5,11.05 | v12,18.5 12,17.01 T2.3
  Bottom 0.254: v15.5,11.05 15.5,17 13.6,18.4 12.1,18.4 v12,18.5
N$22  (via drill 0.3)
  Top 0.254: R7.2 v24,19 | 15.9,16.99 T3.3 16,17.01 16,18.2 16.4,18.6 v16.5,19 16.4,20.05 R11.2
  Bottom 0.254: v24,19 v16.5,19
N$23  (via drill 0.3)
  Route3 0.254: v65.3,34.8 v65.3,44.45
  Bottom 0.254: v65.3,44.45 65.3,46.85 R31.1 | SD1.8 61.25,32.25 63.8,34.8 v65.3,34.8
N$24  (via drill 0.3)
  Route2 0.254: v35.9,48 v40.8,48
  Bottom 0.254: T11.3 35.89,44.99 v35.9,48 | v40.8,48 42.1,48 42.1,43.1 43.45,43.1 R47.1 R49.2
N$25
  Top 0.254: T3.1 T1.1 22,13.97 R5.1
N$26
  Top 0.254: 21.02,43.7 S1.4 S1.3 13,43.77 13,45.1 10.9,47.2 R17.1
N$27  (via drill 0.3)
  Top 0.254: v54.9,11 v54.89,11.01 SW2.S 51.3,11.01 51.3,14 50,14 R23.1 50,13.86 | v57.2,11 SW2.S1
  Bottom 0.254: v54.9,11 v57.2,11
N$28
  Bottom 0.254: R49.1 46,46 46.4,46.4 51.9,46.4 51.9,49 51.02,49 T10.1
N$29
  Top 0.254: SW1.S SW1.S1 34.51,3.49 33,5 33,9 13,9 R22.1
N$30
  Top 0.254: IC2.40 C8.2
N$31  (via drill 0.3)
  Route2 0.254: v43.1,53 v33.3,53
  Bottom 0.254: T10.3 45.54,48.01 R46.1 43.35,48.05 43.1,48.3 v43.1,53 | v33.3,53 33.3,48.05 R48.2
N$32  (via drill 0.3)
  Route2 0.254: v36,43 v50.6,43
  Route3 0.254: v39.8,40 37.4,40 36,41.4 v36,43
  Bottom 0.254: T13.3 v36,43.01 v36,43 | v50.6,43 49,43 R54.2 | R52.1 40.5,43.05 40.5,43 40.8,43 40.8,41 v39.8,40
N$33
  Bottom 0.254: T12.1 51.08,44.02 50.2,44.9 49.05,44.9 R54.1
N$34  (via drill 0.3)
  Route2 0.254: v52.8,51 v39.7,51
  Bottom 0.254: T12.3 55.02,48.05 R53.2 52.8,48.05 v52.8,51 | 38.05,48.1 R51.1 37.9,48.1 39.7,48.1 v39.7,51
N$46
  Top 0.254: IC1.5 56.5,33.85 56.5,30.95 | R13.1 56.5,30.95 | 56.5,30.95 R14.2
PA0_SENSOR_I2C_SDA  (via drill 0.3)
  Top 0.254: R56.2 26.1,43.4 v25.9,43.4 25.9,40.8 27.95,38.75 IC2.1
  Bottom 0.254: X4.1 30,53.2 28.2,53.2 25.9,50.9 v25.9,43.4
PA1_SENSOR_I2C_SCL  (via drill 0.3)
  Top 0.254: IC2.2 27.85,38.25 v25,40.4 | v25,47 25,47.8 18.6,53.9 18.6,54.97 X4.4 | R58.1 9.45,10.95 8.5,11.9 5,11.9 v5,13.4
  Route2 0.254: v5,13.4 5,35.6 9.5,40.4 v25,40.4
  Bottom 0.254: v25,40.4 v25,47
PA2_POWER_LED
  Top 0.254: IC2.3 27.35,37.75 25,39.7 24.1,39.7 22.35,41.5 R18.1
PA3_KEY_START_STOP  (via drill 0.3)
  Top 0.254: SW2.P 52.85,7.05 | 52.85,7.05 LSP2.MP | R20.1 53.08,14.05 C24.2 54.3,14.12 | 54.3,14.12 55.88,14.12 56.1,13.9 56.1,7.05 52.85,7.05 | 54.3,14.12 v54.3,16.3 | IC2.4 27,37.25 26.3,37.8 v25.9,38.1
  Top 0.406: SW2.P1 SW2.P
  Bottom 0.254: v54.3,16.3 32.6,16.3 29.9,18.2 25,18.2 25,21.9 22.4,24.2 22.4,31 25.9,34.3 v25.9,38.1
PA4_SIGNAL_POWER  (via drill 0.3)
  Top 0.254: SW1.P 47,11.11 | 47,11.11 SW1.P1 32.8,11.11 LSP1.MP 25.7,11 25.7,15.1 24.05,15.1 R7.1 23.9,14.95 v23.9,13.5 | IC2.5 26.45,36.75 25.8,37.4 v23,37.4 | R19.2 47,11.11
  Route2 0.254: v23,37.4 20.1,37.4 17.5,35 17.5,26.8 v18.2,26.1
  Route3 0.254: v18.2,26.1 19.8,26.1 21.6,24.3 21.6,13.5 v23.9,13.5
PA5_LOG_FLUSH_LED
  Top 0.254: IC2.6 22.65,36.25 21.5,35.1 R21.1
PB7_LFXTAL_P
  Top 0.254: IC2.15 27.95,31.75 27.2,31.2 27.2,25.95 Q3.2 26.4,24.65 C15.2
PB8_LFXTAL_N
  Top 0.254: IC2.16 28.05,31.25 27.7,30.9 27.7,25.85 Q3.1 28.4,24.45 C10.2
PB11_POWER_GOOD  (via drill 0.3)  (1 unrouted)
  Top 0.254: 31.25,30.7 IC2.21 31.25,25.25 v30.2,23.8 | 59.05,38.9 R12.2 58.95,38.9 v57.5,38.9 | 55.9,35.4 58.3,35.4 v58.5,35.6
  Route3 0.254: v48.4,21.6 60.6,21.6 60.7,21.7 60.7,33.2 v58.5,35.6 58.5,38.9 v57.5,38.9
  Bottom 0.254: v30.2,23.8 30.2,21.6 v48.4,21.6
PB13_HFXTAL_P
  Top 0.254: IC2.24 32.75,22.4 30.7,22.4 30.3,22.2 Q2.2 | 31,21.2 Q2.2 | C14.2 30.91,18.99 30.2,19.7 Q2.2
PB14_HFXTAL_N
  Top 0.254: IC2.25 33.25,21.55 Q2.1 34.3,21.49 35,21.49 C9.2
PC0_US1_TX  (via drill 0.3)
  Top 0.254: IC2.9 24.7,34.75 v24.5,34.5
  Route2 0.254: X7.1 69.5,6.9 56.6,19.9 v55.6,19.9
  Route3 0.254: v24.5,34.5 22.6,32.9 22.6,22.9 25.6,19.9 v55.6,19.9
PC1_US1_RX  (via drill 0.3)
  Top 0.254: IC2.10 25.55,34.25 23.4,32.2 v23.4,30.7
  Route2 0.254: v54,20.7 57.61,20.7 X7.2
  Route3 0.254: v23.4,30.7 23.4,23.1 25.7,20.8 54,20.8 v54,20.7
PC2_SD_SDO  (via drill 0.3)
  Top 0.254: IC2.11 26.1,33.75 24.3,32 v24.3,29.9
  Route2 0.254: v46.7,27.2 v46.7,24.2
  Route3 0.254: v46.7,24.2 46.7,21.7 26.1,21.7 24.3,23.5 v24.3,29.9
  Bottom 0.254: SD1.2 47.1,27.9 v46.7,27.2
PC3_SD_SDI  (via drill 0.3)
  Top 0.254: IC2.12 26.65,33.25 25.1,31.7 v25.1,30.7
  Route3 0.254: v25.1,30.7 25.1,25.6 57.1,25.6 v59.6,28.1
  Bottom 0.254: v59.6,28.1 59.6,30.8 SD1.7 59.55,31.95 63.1,35.7 66.35,35.7 R34.1
PC4_SD_CLK  (via drill 0.3)
  Top 0.254: IC2.13 26.85,32.75 25.9,31.8 v25.9,26.4
  Route3 0.254: v25.9,26.4 53.4,26.4 v53.4,27.6
  Bottom 0.254: SD1.5 54.6,28.9 v53.4,27.6
PC5_SD_CS  (via drill 0.3)
  Top 0.254: v26.6,27.2 26.6,31.8 27.35,32.25 IC2.14
  Route3 0.254: v26.6,27.2 v45.35,27.2
  Bottom 0.254: SD1.1 44.6,27.95 v45.35,27.2
PC6_SD_CD  (via drill 0.3)
  Top 0.254: IC2.37 39.7,33.25 41,31.9 43.6,31.9 v48,29
  Route2 0.254: v63.6,22.9 57.2,29 v48,29 v48,35
  Bottom 0.254: 46.2,36.05 R33.1 46.15,35 v48,35 | SD1.CDS 64.8,21.7 v63.6,22.9
PC7_SD_WP  (via drill 0.3)
  Top 0.254: IC2.38 39.95,33.75 41.2,32.5 v44.7,32.5
  Route2 0.254: v44.7,32.5 44.7,18.6 56.4,18.6 62.8,12.2 v62.8,10.3
  Bottom 0.254: v62.8,10.3 64.8,10.3 SD1.WPS 64.83,10.3 66.9,10.3 68.1,11.5 68.1,15.8 70.7,18.4 77.1,18.4 78.3,19.9 78.3,39.95 R35.1
PC9_SENSOR2_MOSFET  (via drill 0.3)
  Top 0.254: IC2.42 40.15,35.75 v40.6,35.4
  Route3 0.254: v40.6,35.4 40.6,35.9 12.3,35.9 v12.3,36.2
  Bottom 0.254: v12.3,36.2 11,36.2 R41.2
PC10_SENSOR2_ADDR  (via drill 0.3)
  Top 0.254: IC2.43 40.85,36.25 v41.7,36.8
  Route2 0.254: v41.7,36.8 41.7,14.5 32.6,14.5 30,11.8 13.41,11.8 X5.2
PC11_SENSOR2_ALERT  (via drill 0.3)
  Top 0.254: IC2.44 40.45,36.75 41.3,37.6 v42.4,37.6
  Route2 0.254: v42.4,37.6 42.5,13.8 33,13.8 29.8,10.6 16.22,10.6 X5.3
PC12_SD_PULLUP  (via drill 0.3)
  Top 0.254: v44.6,38.3 40.95,38.3 40.1,37.3 37.5,37.3 IC2.45
  Bottom 0.254: R33.2 44.25,37.35 44.6,37.7 v44.6,38.3
PC13_SENSOR2_RESET  (via drill 0.3)
  Top 0.254: IC2.46 39.5,37.75 40.7,39.1 v43.1,39.1
  Route2 0.254: v43.1,39.1 43.1,8.2 22.05,8.2 X5.6
PC14_SENSOR2_RESERVE  (via drill 0.3)
  Top 0.254: IC2.47 39,38.25 40.6,39.9 v43.8,39.9
  Route2 0.254: X5.7 25.86,7.2 43.8,7.2 v43.8,39.9
PD0_SD_POWER  (via drill 0.3)
  Top 0.254: IC2.28 34.75,27.05 35.5,26 48.9,26 48.9,39.9 v51.5,39.9
  Bottom 0.254: 52.45,39.9 v51.5,39.9
  Bottom 0.406: R24.2 52.45,39.9
PD1_HOLD_POWER  (via drill 0.3)
  Top 0.254: IC2.29 35.25,28.73 36.03,28.05 36.25,27.9 v38.1,27.9 | R1.1 v20,23.5
  Route2 0.254: v20,23.5 25.4,23.5 v29.1,27.9
  Bottom 0.254: v29.1,27.9 v38.1,27.9
PD2_PULS1_COUNTER  (via drill 0.3)
  Top 0.254: IC2.30 35.75,29.13 36.41,28.47 37.27,28.47 v37.3,28.5
  Bottom 0.254: T11.1 32.91,44.1 32.2,44.1 27.6,39.3 27.6,29.8 29.1,28.5 v37.3,28.5 | 33,44.04 T11.1 | T11.1 32.98,46.32 32.4,46.9 32.4,48.15 | C29.1 30.8,49.5 30.8,48.2 32,48.2 R50.2
  Bottom 0.406: 32.4,48.15 32,48.15 R50.2
PD3_PULS2_COUNTER  (via drill 0.3)  (1 unrouted)
  Top 0.254: IC2.31 36.25,29.65 36.8,29.2 v38,29.2
  Route2 0.254: v57,47 v39,47
  Bottom 0.254: v38,29.2 37.9,40.6 39,41.7 39,43.96 T13.1 | C30.1 v57,47 R55.2 | v39,47 39,43.99
PD4_LEUART_TX  (via drill 0.3)
  Top 0.254: IC2.32 36.75,29.9 v38.7,29.9 | R28.1 v58.5,24.9
  Bottom 0.254: v38.7,29.9 38.7,27.5 40.1,26 57.5,26 58.6,24.9 v58.5,24.9
PD5_LEUART_RX  (via drill 0.3)
  Top 0.254: IC2.33 38.55,31.25 39.9,30.1 43.7,30.1 v46,28.3 | 64.65,15.6 R27.1 65,17 v63.8,17
  Route2 0.254: v63.8,17 63.8,21.6 56.8,28.3 v46,28.3
PD6_SENSOR_I2C_SDA  (via drill 0.3)
  Top 0.254: R57.1 3.05,9.4 3.05,9 | 3.05,9 3.05,5.05 X5.1 | IC2.34 39.55,31.75 v40.4,30.9 | v8.5,9 3.05,9
  Route2 0.254: v8.5,9 8.5,10.6 15.2,17.5 35.3,17.5 35.3,27.6 38.6,30.9 v40.4,30.9
PD7_SENSOR_I2C_SCL  (via drill 0.3)
  Top 0.254: X5.4 11.8,7.83 11.8,10.3 9.45,12.45 R59.1 10.8,14.75 v10.8,16 | IC2.35 v39.8,32.25
  Route2 0.254: v10.8,16 12.8,18.2 33.8,18.2 33.8,27.7 38.35,32.25 v39.8,32.25
PE9_SENSOR1_MOSFET  (via drill 0.3)
  Top 0.254: IC2.57 32.75,40.95 v33.5,41.7
  Route2 0.254: v33.5,41.7 29.1,41.7 27.1,39.5 v16.4,39.5
  Bottom 0.254: R36.2 16.85,38.05 16.4,38.5 v16.4,39.5
PE10_US0_TX
  Top 0.254: X3.1 53.9,51.7 34.7,51.7 34.6,44.2 32.25,41.85 IC2.58
PE11_US0_RX
  Top 0.254: X3.2 50.59,52.2 34.22,52.2 34.2,52.22 34.1,44.4 31.75,42.05 IC2.59
PE12_SENSOR1_ADDR
  Top 0.254: X4.2 26.09,52.71 26.2,52.6 31.7,52.6 33.6,50.7 33.6,44.6 31.25,42.15 IC2.60
PE13_SENSOR1_ALERT
  Top 0.254: IC2.61 30.75,42.45 33,44.7 33,50 31.1,51.9 23.1,51.9 22.4,52.6 22.4,54.98 X4.3
PE14_SENSOR1_RESET  (via drill 0.3)
  Top 0.254: IC2.62 30.25,41.05 29,42.3 v27.4,42.3
  Route2 0.254: v27.4,42.3 23.65,42.3 X4.6
PE15_SENSOR1_RESERVE  (via drill 0.3)
  Top 0.254: IC2.63 29.75,40.75 29.2,41.3 v27.1,41.3
  Route2 0.254: v27.1,41.3 20.84,41.3 X4.7
PF0_DBG_SWCLK  (via drill 0.3)
  Top 0.254: IC2.49 36.75,40.15 38.1,41.5 v40,41.5
  Route2 0.254: v40,41.5 73.2,41.5 73.2,31 72.9,30.7 71,30.7 X2.4
PF1_DBG_SWDIO  (via drill 0.3)
  Top 0.254: 36.25,39.85 IC2.50 36.25,40.45 v37.2,41.6
  Route2 0.254: X2.2 73.2,28.6 74.8,30.3 74.8,41.2 73.5,42.3 37.9,42.3 v37.2,41.6
PF2_DBG_SWO  (via drill 0.3)
  Top 0.254: IC2.51 35.75,41.15 36.15,41.65 37.7,43.2 v37.7,44 | v75.8,41.3 75.8,32.6 X2.6
  Route2 0.254: v37.7,44 51.3,44 52.2,43 v66.3,43
  Route3 0.254: v66.3,43 66.3,42.2 67.2,41.3 v75.8,41.3
PULS1_COUNTER
  Bottom 0.254: 45.5,55.1 X6.1 R46.2
PULS2_COUNTER
  Bottom 0.254: X6.3 37.88,54.3 R51.2
RXD_HOST
  Top 0.254: J1.P$3 70.65,20.35 68.2,17.8 58.6,17.8 58.6,19.05 R28.2
SD_3V  (via drill 0.3)
  Route2 0.406: v57.5,38 v51.2,38
  Bottom 0.254: 68.05,39.9 R34.2 68.15,40.1 | 48.9,38.15 R32.2 49.05,38.1 | 59.1,36.5 59,36.6 | 59,39.2 59,39.01 T5.1 59.01,38 | 51.1,38.1 v51.2,38 | 68.1,48.85 C26.1
  Bottom 0.406: R35.2 R30.2 69.9,38 69.3,39.9 68.05,39.9 | C25.1 48.9,38.15 | R34.2 66.65,39.95 66.3,39.6 66.3,37.4 65.4,36.5 59.1,36.5 | 59,36.6 59,39.01 | v57.5,38 59.01,38 | 49.05,38.1 51.1,38.1 | SD1.4 52.1,36.1 v51.2,38 | R31.2 68.1,48.85 | 68.15,40.1 C26.1
TXD_HOST
  Top 0.254: J1.P$2 71.05,19.65 65.5,14.1 65.05,14.1 R27.2
VBATT  (via drill 0.3)
  Top 0.254: 12.95,12.95 R22.2 | 69.8,39.2 C6.2 | T2.2 11.98,14.92
  Top 0.406: D1.C v3,11.9 | v11.3,11.9 11.3,12.95 12.95,12.95 | v19.7,12.45 19.2,12.95 R4.2 R22.2 13,13.9 11.98,14.92 | D3.1 66.83,39.02 67.3,39.5 C6.2 69.6,36.7 68.4,36.7 67.1,35.4 v67.1,19.1
  Bottom 0.406: v3,11.9 v11.3,11.9 | v67.1,19.1 67.1,14.5 32.4,14.5 30.4,12.25 19.9,12.25 v19.7,12.45
VDD_SENSOR1
  Bottom 0.254: 17.9,49.95 C27.1 18.1,49.85
  Bottom 0.406: X4.5 14.76,54.54 17.9,51.4 17.9,49.95 | C27.1 16.09,49.85 T7.1 | 18.1,49.85 20.9,49.85 R40.2
VDD_SENSOR2
  Bottom 0.254: 2,48.98 2,48.9 1.9,48.9 | 5,44.8 C28.1 | 8,44.85 R45.2
  Bottom 0.406: X5.5 18.25,9.9 12.5,9.9 12.5,14.3 3.7,14.3 3.5,14.5 3.5,44.75 C28.1 8,44.85 | T9.1 2,48.98 | 1.9,48.9 1.9,44.8 5,44.8
VMCU  (via drill 0.3)  (1 unrouted)
  Top 0.254: C21.2 | C12.2 44.79,13.8 45.2,14 | R20.2 56,16.05 | R6.2 15.1,21.95 | v16.4,23.5 16.4,23.3 | 14.02,17.32 v14,17.3 | IC2.55 33.75,40.45 | C19.2 53.99,23.01 | R16.2 19.1,39.9 | 33.7,30.55 IC2.26 33.75,24.2 | IC2.8 v23.4,35.25 | v52.79,23.01 v52.8,23 | 40.7,25 v40.7,24.9 | IC2.39 40.35,34.25
  Top 0.305: 40.35,34.25 v40.7,34
  Top 0.406: X2.1 v68.9,25.9 | 56,16.05 v56,17.6 | L2.1 41,13.8 v40,13 | 15.1,21.95 15.1,23.5 v16.4,23.5 | T2.1 14.02,17.32 | R57.2 v6.3,10.5 R58.2 | R59.2 v6.3,13.4 | 33.75,40.45 v35,41.7 | 53.99,23.01 v55.9,23 | D2.2 D2.3 46.01,32.89 v45.5,33.4 | v23,47 23,45.35 R56.1 | v45,12.6 C12.2 | C17.2 v52.79,23.01 | 33.75,24.2 v38.2,24.2 | C21.2 40.7,25 | 19.1,39.9 19.1,38.55 v19.6,38.05 | C22.2 49.49,24.99 v49.9,24.6 | v60.3,19.8 60.6,19 61.9,19 61.9,19.01 C13.2 | C11.2 35.51,14.01 v34.4,13
  Route3 0.406: v38.2,24.2 39.9,24.2 v40.7,24.9 | v56,17.6 60.28,17.6 60.28,19.8 v60.3,19.8
  Bottom 0.254: 35,43.04 T11.2 | 37,44.9 36.94,44.9 | 36.8,45 36.94,44.9 | 36.94,44.9 T13.2 | R52.2 | 37,46.02 37,46 | R42.2 | T7.2
  Bottom 0.406: v35,41.7 35,43.04 | T11.2 35.02,43.72 37,44.2 37,44.9 | R47.2 v43.5,46.2 | R52.2 v40.7,46.2 | T13.2 37,46.02 | R42.2 v8,51.5 | R37.2 9.5,49.95 v9.5,51.5 | T7.2 12.9,49.94 v12.9,51.5 | T9.2 3,49.94 3,51.9 6.1,51.9 v6.2,52 | v37,46.1 37,46 37,45.1
  pour Route3: 5,52.5 47,52.5 47,37 72.5,37 72.5,26.4 67.5,26.4 67.5,12 23.5,12 23.5,9.5 5,9.5
VSD_CARD  (via drill 0.3)
  Top 0.254: 47,34.04 D2.1
  Top 0.406: v56.3,36.1 56.3,40.25 C5.1 | C4.+ 47,36.1 | 47,36.1 47,34.04 | v48,36.1 47,36.1
  Route2 0.406: v48,36.1 v56.3,36.1 57.2,37.2 v62,37.2
  Bottom 0.254: T5.2 60.98,38.1 62,38.1
  Bottom 0.305: 62,38.1 v62,37.2
  Bottom 0.406: R25.2 T5.2

## Text on the board
Top: PL28012019 | BS
Route2: LY2
Route3: LY3
Bottom: PL28012019 | LS
tPlace: LOGGER_2019_1
tNames: GND | RES | RESET | VDD | I2C_SCL | ALERT | ADDR | I2C_SDA | GND | PULS2 | GND | PULS1 | GND_US0 | RX_US0 | US0_TX | BATT_IN | BATT_GND | 1 | 1 | US1_ / RX | ADDR | ALERT | I2C_SCL | VDD | RESET | RES | GND | US1_TX | GND | I2C_SDA